# Altium PCB ConnectorBoard.PcbDoc (part 2 of 2)
Units mm, origin at the board's own origin, x right, y up, seen from the top; angles counter-clockwise.
Board outline 139.19 x 208 mm, 4 copper layers (Top Layer, GND, Mid-Layer 1, Bottom Layer); 72 components, 192 nets, 1111 pads, 260 vias.
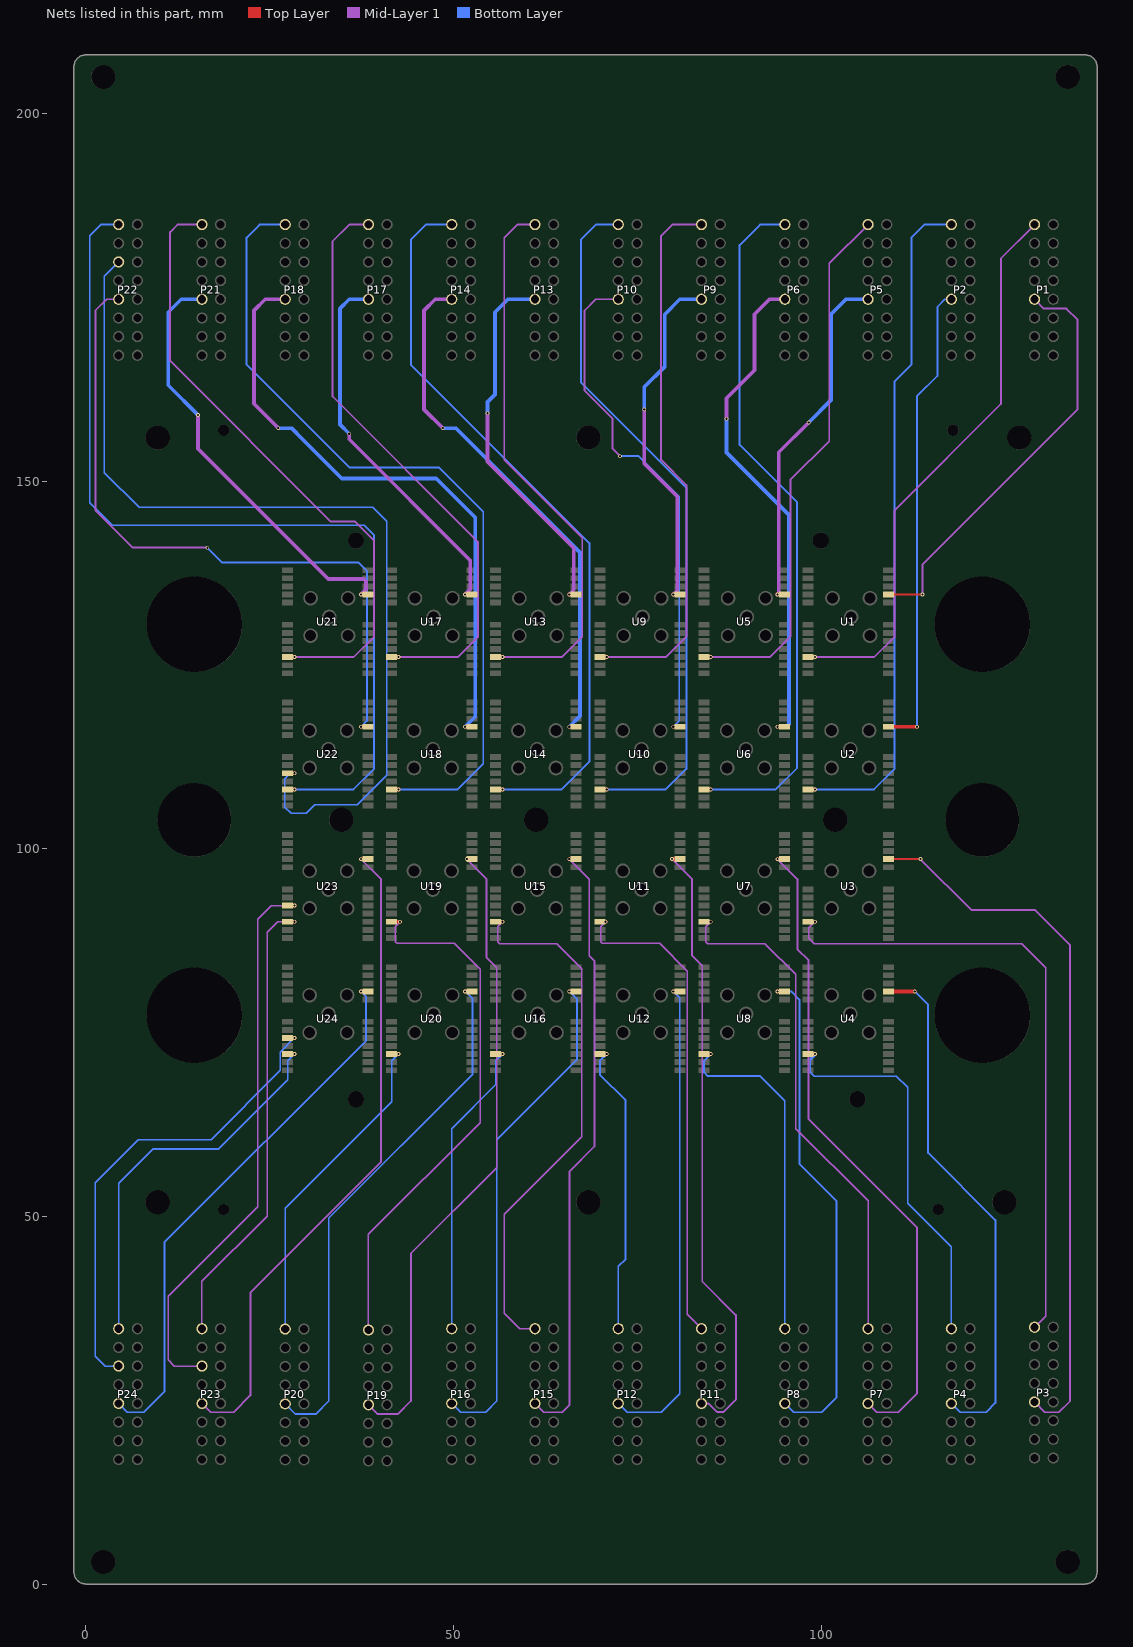
[diagram p4: the nets of this part, all layers, seen from the top]

## Via types
v1: diameter 0.508, hole 0.305, Top Layer to Bottom Layer, tented both sides, 188 vias
v2: diameter 1.016, hole 0.762, Top Layer to Bottom Layer, tented both sides, 72 vias

## Nets (pads, with @x,y where several pads share a name; then routed paths per layer and width w, separated by ;. In a path a pad name is that pad's centre, name@x,y a point inside that pad or via, vN(x,y) a via of type N, cw(c..) or ccw(c..) an arc to the next point about the centre after c; other vN are vias at no path point) (continued)
TXD0_RF22: P22.6 U22.20 | length 128
  Top Layer w0.508: U22.20@27.407,110.28 v1(28.346,110.28)
  Bottom Layer w0.203: P22.6@4.446,179.832 2.489,177.875 2.489,151.181 7.24,146.43 39.006,146.43 40.909,144.526 40.909,109.997 36.888,105.976 31.135,105.976 29.972,104.813 27.904,104.813 27.041,105.676 27.041,109.559 27.762,110.28 v1(28.346,110.28)
TXD0_RF23: P23.6 U23.20 | length 76.6
  Top Layer w0.508: U23.20@27.407,92.28 v1(28.346,92.28)
  Mid-Layer 1 w0.203: P23.6@15.772,29.642 12.014,29.642 11.176,30.48 11.176,39.116 23.368,51.308 23.368,90.424 25.224,92.28 v1(28.346,92.28)
TXD0_RF24: P24.6 U24.20 | length 65
  Top Layer w0.508: U24.20@27.407,74.28 v1(28.346,74.28)
  Bottom Layer w0.203: P24.6@4.446,29.642 2.616,29.642 1.27,30.988 1.27,54.61 7.112,60.452 17.02,60.452 26.418,69.85 26.418,72.352 v1(28.346,74.28)
VBAT_RF1: P1.2 U1.22 | length 76.9
  Top Layer w0.508: U1.22@98.207,126.08 v1(99.146,126.08)
  Mid-Layer 1 w0.254: v1(99.146,126.08) 107.188,126.08 109.982,128.874 109.982,146.05 124.46,160.528 124.46,180.34 P1.2@129.032,184.912
VBAT_RF2: P2.2 U2.22 | length 92.3
  Top Layer w0.508: U2.22@98.207,108.08 v1(99.146,108.08)
  Bottom Layer w0.254: v1(99.146,108.08) 107.188,108.08 109.982,110.874 109.982,163.576 112.268,165.862 112.268,183.134 114.046,184.912 P2.2@117.706,184.912
VBAT_RF3: P3.2 U3.22 | length 87
  Top Layer w0.508: U3.22@98.207,90.08 v1(99.146,90.08)
  Mid-Layer 1 w0.203: v1(99.146,90.08) 98.298,89.232 98.298,87.865 99.041,87.122 127.254,87.122 130.556,83.82 130.556,36.449 P3.2@129.032,34.925
VBAT_RF4: P4.2 U4.22 | length 55
  Top Layer w0.508: U4.22@98.207,72.08 v1(99.146,72.08)
  Bottom Layer w0.203: P4.2@117.706,34.722 117.706,45.87 111.76,51.816 111.76,67.564 110.236,69.088 99.075,69.088 98.536,69.627 98.536,70.132 98.552,70.148 98.536,70.164 98.536,70.98 98.536,71.232 ; 98.536,71.232 98.536,71.248 ; 98.536,71.232 99.146,71.842 v1@99.146,71.858 ; 98.536,71.248 98.536,71.47 v1(99.146,72.08) v1@99.146,71.858 ; 98.536,71.248 v1@99.146,71.858
VBAT_RF5: P5.2 U5.22 | length 73.6
  Top Layer w0.508: U5.22@83.82,126.08 v1(84.986,126.08)
  Mid-Layer 1 w0.254: v1(84.986,126.08) 93.028,126.08 95.822,128.874 95.822,144.272 95.822,150.178 101.092,155.448 101.092,179.624 P5.2@106.38,184.912
VBAT_RF6: P6.2 U6.22 | length 95.8
  Top Layer w0.508: U6.22@83.82,108.08 v1(84.986,108.08)
  Bottom Layer w0.254: v1(84.986,108.08) 93.809,108.08 96.723,110.993 96.723,147.117 88.9,154.94 88.9,182.118 91.694,184.912 P6.2@95.054,184.912
VBAT_RF7: P7.2 U7.22 | length 70.5
  Top Layer w0.508: U7.22@83.82,90.08 v1(84.986,90.08)
  Mid-Layer 1 w0.203: v1(84.986,90.08) 84.328,89.422 84.328,87.376 84.582,87.122 92.356,87.122 96.571,82.907 96.571,61.925 106.38,52.116 P7.2@106.38,34.722
VBAT_RF8: P8.2 U8.22 | length 47.6
  Top Layer w0.508: U8.22@83.82,72.08 v1(84.986,72.08)
  Bottom Layer w0.254: v1(84.986,72.08) 84.074,71.168 84.074,69.596 84.582,69.088 91.694,69.088 95.054,65.728 P8.2@95.054,34.722
VBAT_RF9: P9.2 U9.22 | length 75.3
  Top Layer w0.508: U9.22@69.596,126.08 v1(70.826,126.08)
  Mid-Layer 1 w0.254: v1(70.826,126.08) 78.868,126.08 81.662,128.874 81.662,149.478 78.232,152.908 78.232,183.388 79.756,184.912 P9.2@83.728,184.912
VBAT_RF10: P10.2 U10.22 | length 97.1
  Top Layer w0.508: U10.22@69.596,108.08 v1(70.826,108.08)
  Bottom Layer w0.254: v1(70.826,108.08) 78.868,108.08 81.662,110.874 81.662,149.098 67.31,163.45 67.31,182.88 69.342,184.912 P10.2@72.402,184.912
VBAT_RF11: P11.2 U11.22 | length 66.9
  Top Layer w0.508: U11.22@69.596,90.084 v1(70.653,90.084)
  Mid-Layer 1 w0.203: v1(70.653,90.084) 69.995,89.426 69.995,87.38 70.249,87.126 78.023,87.126 81.788,83.362 81.788,36.662 P11.2@83.728,34.722
VBAT_RF12: P12.2 U12.22 | length 40.8
  Top Layer w0.508: U12.22@69.596,72.08 v1(70.826,72.08)
  Bottom Layer w0.254: v1(70.826,72.08) 69.914,71.168 69.914,69.298 73.406,65.806 73.406,44.196 72.402,43.192 P12.2@72.402,34.722
VBAT_RF13: P13.2 U13.22 | length 76.5
  Top Layer w0.508: U13.22@55.727,126.08 v1(56.666,126.08)
  Mid-Layer 1 w0.254: v1(56.666,126.08) 64.708,126.08 67.502,128.874 67.502,142.302 56.896,152.908 56.896,183.134 58.674,184.912 P13.2@61.076,184.912
VBAT_RF14: P14.2 U14.22 | length 101.8
  Top Layer w0.508: U14.22@55.727,108.08 v1(56.666,108.08)
  Bottom Layer w0.254: P14.2@49.75,184.912 46.228,184.912 44.196,182.88 44.196,165.862 68.478,141.58 68.478,111.85 64.708,108.08 v1(56.666,108.08)
VBAT_RF15: P15.2 U15.22 | length 73.2
  Top Layer w0.508: U15.22@55.727,90.08 v1(56.666,90.08)
  Mid-Layer 1 w0.203: v1(56.666,90.08) 56.008,89.422 56.008,87.376 56.262,87.122 64.036,87.122 67.462,83.695 67.462,60.858 56.896,50.292 56.896,36.83 59.004,34.722 P15.2@61.076,34.722
VBAT_RF16: P16.2 U16.22 | length 41.2
  Top Layer w0.508: U16.22@55.727,72.08 v1(56.666,72.08)
  Bottom Layer w0.254: P16.2@49.75,34.722 49.75,61.942 55.754,67.946 55.754,71.168 v1(56.666,72.08)
VBAT_RF17: P17.2 U17.22 | length 80.7
  Top Layer w0.508: U17.22@41.567,126.08 v1(42.506,126.08)
  Mid-Layer 1 w0.254: P17.2@38.424,184.912 35.814,184.912 33.528,182.626 33.528,161.544 53.342,141.73 53.342,128.874 50.548,126.08 v1(42.506,126.08)
VBAT_RF18: P18.2 U18.22 | length 111.9
  Top Layer w0.508: U18.22@41.567,108.08 v1(42.506,108.08)
  Bottom Layer w0.254: P18.2@27.098,184.912 23.622,184.912 21.844,183.134 21.844,165.862 35.814,151.892 48.006,151.892 54.038,145.859 54.038,111.57 50.548,108.08 v1(42.506,108.08)
VBAT_RF19: P19.2 U19.22 | length 72.6
  Top Layer w0.508: U19.22@41.567,90.084 v1(42.713,90.084)
  Mid-Layer 1 w0.203: P19.2@38.424,34.544 38.424,47.568 53.594,62.738 53.594,83.616 50.083,87.126 42.309,87.126 42.055,87.38 42.055,89.426 v1(42.713,90.084)
VBAT_RF20: P20.2 U20.22 | length 44.7
  Top Layer w0.508: U20.22@41.567,72.08 v1(42.506,72.08)
  Bottom Layer w0.254: P20.2@27.098,34.671 27.098,51.097 41.594,65.593 41.594,71.168 v1(42.506,72.08)
VBAT_RF21: P21.2 U21.22 | length 86.1
  Top Layer w0.508: U21.22@27.407,126.08 v1(28.346,126.08)
  Mid-Layer 1 w0.254: P21.2@15.772,184.912 12.446,184.912 11.43,183.896 11.43,166.37 33.297,144.503 36.599,144.503 39.182,141.92 39.182,128.874 36.388,126.08 v1(28.346,126.08)
VBAT_RF22: P22.2 U22.22 | length 126.1
  Top Layer w0.508: U22.22@27.407,108.08 v1(28.346,108.08)
  Bottom Layer w0.254: P22.2@4.446,184.912 2.032,184.912 0.508,183.388 0.508,147.066 3.556,144.018 37.846,144.018 39.182,142.682 39.182,110.874 36.388,108.08 v1(28.346,108.08)
VBAT_RF23: P23.2 U23.22 | length 62.8
  Top Layer w0.508: U23.22@27.407,90.08 v1(28.346,90.08)
  Mid-Layer 1 w0.203: P23.2@15.772,34.722 15.772,41.172 24.638,50.038 24.638,88.646 26.072,90.08 v1(28.346,90.08)
VBAT_RF24: P24.2 U24.22 | length 53.4
  Top Layer w0.508: U24.22@27.407,72.08 v1(28.346,72.08)
  Bottom Layer w0.254: P24.2@4.446,34.722 4.446,54.484 9.144,59.182 18.034,59.182 27.434,68.582 27.434,71.168 v1(28.346,72.08)
VCC_RF_RF1: P1.10 U1.9 | length 57.7
  Top Layer w0.254: U1.9@109.147,134.6 v1(113.797,134.6)
  Mid-Layer 1 w0.254: v1(113.797,134.6) 113.797,138.689 134.874,159.766 134.874,171.958 133.35,173.482 130.302,173.482 P1.10@129.032,174.752
VCC_RF_RF2: P2.10 U2.9 | length 64.5
  Top Layer w0.508: U2.9@109.147,116.6 v1(113.03,116.6)
  Bottom Layer w0.254: v1(113.03,116.6) 113.027,116.602 113.027,161.541 115.824,164.338 115.824,173.736 116.84,174.752 P2.10@117.706,174.752
VCC_RF_RF3: P3.10 U3.9 | length 97.6
  Top Layer w0.254: U3.9@109.147,98.602 v1(113.498,98.602)
  Mid-Layer 1 w0.254: v1(113.498,98.602) 120.406,91.694 129.032,91.694 133.858,86.868 133.858,24.892 132.334,23.368 130.429,23.368 P3.10@129.032,24.765
VCC_RF_RF4: P4.10 U4.9 | length 71.1
  Top Layer w0.508: U4.9@109.147,80.602 v1(112.731,80.602)
  Bottom Layer w0.254: v1(112.731,80.602) 114.554,78.779 114.554,58.645 123.698,49.501 123.698,24.638 122.428,23.368 118.9,23.368 P4.10@117.706,24.562
VCC_RF_RF5: P5.10 U5.9 | length 48
  Top Layer w0.508: v1(94.047,134.6) U5.9@94.987,134.6
  Mid-Layer 1 w0.508: v1(94.047,134.6) 94.245,134.797 94.245,153.935 v1(98.298,157.988)
  Bottom Layer w0.508: v1(98.298,157.988) 101.346,161.036 101.346,172.72 103.378,174.752 P5.10@106.38,174.752
VCC_RF_RF6: P6.10 U6.9 | length 68.5
  Top Layer w0.508: v1(94.047,116.6) U6.9@94.987,116.6
  Mid-Layer 1 w0.508: v1(87.122,158.496) 87.122,161.29 90.932,165.1 90.932,172.72 92.964,174.752 P6.10@95.054,174.752
  Bottom Layer w0.508: v1(87.122,158.496) 87.122,153.924 95.631,145.415 95.631,116.967 95.264,116.6 v1(94.047,116.6)
VCC_RF_RF7: P7.10 U7.9 | length 89.7
  Top Layer w0.508: v1(94.047,98.6) U7.9@94.987,98.6
  Mid-Layer 1 w0.254: v1(94.047,98.6) 96.774,95.873 96.774,86.36 98.298,84.836 98.298,63.246 113.03,48.514 113.03,25.908 110.49,23.368 107.574,23.368 P7.10@106.38,24.562
VCC_RF_RF8: P8.10 U8.9 | length 69
  Top Layer w0.508: v1(94.047,80.6) U8.9@94.987,80.6
  Bottom Layer w0.254: v1(94.047,80.6) 95.93,80.6 97.028,79.502 97.028,57.15 102.108,52.07 102.108,25.4 100.076,23.368 96.248,23.368 P8.10@95.054,24.562
VCC_RF_RF9: P9.10 U9.9 | length 48.3
  Top Layer w0.508: v1(79.887,134.6) U9.9@81.026,134.6
  Mid-Layer 1 w0.508: v1(75.946,159.766) 75.946,152.4 79.887,148.459 80.416,147.93 80.416,135.129 v1(79.887,134.6)
  Bottom Layer w0.508: v1(75.946,159.766) 75.946,162.814 78.74,165.608 78.74,172.72 80.772,174.752 P9.10@83.728,174.752
VCC_RF_RF10: P10.10 U10.9 | length 70.1
  Top Layer w0.508: v1(79.887,116.6) U10.9@81.026,116.6
  Mid-Layer 1 w0.254: P10.10@72.402,174.752 69.342,174.752 67.818,173.228 67.818,162.306 71.628,158.496 71.628,154.432 v1(72.644,153.416)
  Bottom Layer w0.254: v1(72.644,153.416) 75.184,153.416 80.697,147.903 80.697,117.409 v1(79.887,116.6)
VCC_RF_RF11: P11.10 U11.9 | length 84.3
  Top Layer w0.508: v1(79.715,98.604) U11.9@81.026,98.604
  Mid-Layer 1 w0.254: v1(79.715,98.604) 82.441,95.877 82.441,85.453 83.82,84.074 83.82,41.148 88.392,36.576 88.392,25.069 86.741,23.419 85.795,23.419 84.652,24.562 P11.10@83.728,24.562
VCC_RF_RF12: P12.10 U12.9 | length 66.1
  Top Layer w0.508: v1(79.887,80.6) U12.9@81.026,80.6
  Bottom Layer w0.254: P12.10@72.402,24.562 73.596,23.368 78.232,23.368 80.772,25.908 80.772,79.715 v1(79.887,80.6)
VCC_RF_RF13: P13.10 U13.9 | length 51.2
  Top Layer w0.508: v1(65.727,134.6) U13.9@66.802,134.6
  Mid-Layer 1 w0.508: v1(54.61,159.258) 54.61,152.654 66.359,140.905 66.359,135.231 v1(65.727,134.6)
  Bottom Layer w0.508: v1(54.61,159.258) 54.61,160.782 55.626,161.798 55.626,172.974 57.404,174.752 P13.10@61.076,174.752
VCC_RF_RF14: P14.10 U14.9 | length 72.6
  Top Layer w0.508: v1(65.727,116.6) U14.9@66.802,116.6
  Mid-Layer 1 w0.508: v1(48.514,157.226) 45.974,159.766 45.974,173.228 47.498,174.752 P14.10@49.75,174.752
  Bottom Layer w0.508: v1(48.514,157.226) 50.292,157.226 67.208,140.31 67.208,118.081 v1(65.727,116.6)
VCC_RF_RF15: P15.10 U15.9 | length 83.7
  Top Layer w0.508: v1(65.727,98.6) U15.9@66.802,98.6
  Mid-Layer 1 w0.254: P15.10@61.076,24.562 62.27,23.368 64.77,23.368 65.786,24.384 65.786,56.134 69.164,59.512 69.164,84.76 68.454,85.47 68.454,95.873 v1(65.727,98.6)
VCC_RF_RF16: P16.10 U16.9 | length 69
  Top Layer w0.508: v1(65.727,80.6) U16.9@66.802,80.6
  Bottom Layer w0.254: P16.10@49.75,24.562 50.944,23.368 54.356,23.368 55.88,24.892 55.88,60.452 66.802,71.374 66.802,79.525 v1(65.727,80.6)
VCC_RF_RF17: P17.10 U17.9 | length 51.8
  Top Layer w0.508: v1(51.567,134.6) U17.9@52.507,134.6
  Mid-Layer 1 w0.508: v1(35.814,156.464) 35.814,155.702 52.25,139.266 52.25,135.282 v1(51.567,134.6)
  Bottom Layer w0.508: v1(35.814,156.464) 34.544,157.734 34.544,173.482 35.814,174.752 P17.10@38.424,174.752
VCC_RF_RF18: P18.10 U18.9 | length 85.1
  Top Layer w0.508: v1(51.567,116.6) U18.9@52.507,116.6
  Mid-Layer 1 w0.508: v1(26.162,157.226) 22.86,160.528 22.86,173.228 24.384,174.752 P18.10@27.098,174.752
  Bottom Layer w0.508: v1(26.162,157.226) 27.94,157.226 29.464,155.702 ; 28.702,156.464 29.464,155.702 ; v1(51.567,116.6) 52.946,117.979 52.946,145.074 47.652,150.368 34.798,150.368 29.464,155.702
VCC_RF_RF19: P19.10 U19.9 | length 88.8
  Top Layer w0.508: v1(51.775,98.604) U19.9@52.507,98.604
  Mid-Layer 1 w0.254: P19.10@38.424,24.384 39.694,23.114 42.418,23.114 44.196,24.892 44.196,44.958 55.88,56.642 55.88,83.82 54.501,85.199 54.501,87.122 ; v1(51.775,98.604) 54.501,95.877 54.501,87.122 ; 54.501,86.364 54.501,87.122
VCC_RF_RF20: P20.10 U20.9 | length 72.4
  Top Layer w0.508: v1(51.567,80.6) U20.9@52.507,80.6
  Bottom Layer w0.254: P20.10@27.098,24.511 28.495,23.114 31.242,23.114 33.02,24.892 33.02,49.784 52.578,69.342 52.578,79.589 v1(51.567,80.6)
VCC_RF_RF21: P21.10 U21.9 | length 59.2
  Top Layer w0.508: v1(37.407,134.6) U21.9@38.608,134.6
  Mid-Layer 1 w0.508: v1(15.24,159.004) 15.24,154.432 32.309,137.363 32.512,137.16 32.956,136.716 36.168,136.716 37.772,136.716 38.09,136.398 38.09,135.282 v1(37.407,134.6)
  Bottom Layer w0.508: v1(15.24,159.004) 11.176,163.068 11.176,172.974 12.954,174.752 P21.10@15.772,174.752
VCC_RF_RF22: P22.10 U22.9 | length 94.1
  Top Layer w0.508: v1(37.407,116.6) U22.9@38.608,116.6
  Mid-Layer 1 w0.254: P22.10@4.446,174.752 2.794,174.752 1.27,173.228 1.27,146.05 6.35,140.97 v1(16.51,140.97)
  Bottom Layer w0.254: v1(16.51,140.97) 18.542,138.938 37.084,138.938 38.217,137.805 38.217,117.409 v1(37.407,116.6)
VCC_RF_RF23: P23.10 U23.9 | length 90.9
  Top Layer w0.508: v1(37.407,98.6) U23.9@38.608,98.6
  Mid-Layer 1 w0.254: P23.10@15.772,24.562 16.966,23.368 20.066,23.368 22.352,25.654 22.352,39.624 40.134,57.406 40.134,86.614 ; v1(37.407,98.6) 40.134,95.873 40.134,86.614 ; 40.134,86.36 40.134,86.614
VCC_RF_RF24: P24.10 U24.9 | length 75.2
  Top Layer w0.508: v1(37.407,80.6) U24.9@38.608,80.6
  Bottom Layer w0.254: P24.10@4.446,24.562 5.64,23.368 7.874,23.368 10.668,26.162 10.668,46.482 38.1,73.914 38.1,79.907 v1(37.407,80.6)
pads on no net: P1.3 P1.4 P1.7 P1.8 P1.11 P1.12 P1.16 P2.3 P2.4 P2.7 P2.8 P2.11 P2.12 P2.16 P3.3 P3.4 P3.7 P3.8 P3.11 P3.12 P3.16 P4.3 P4.4 P4.7 P4.8 P4.11 P4.12 P4.16 P5.3 P5.4 P5.7 P5.8 P5.11 P5.12 P5.16 P6.3 P6.4 P6.7 P6.8 P6.11 P6.12 P6.16 P7.3 P7.4 P7.7 P7.8 P7.11 P7.12 P7.16 P8.3 P8.4 P8.7 P8.8 P8.11 P8.12 P8.16 P9.3 P9.4 P9.7 P9.8 P9.11 P9.12 P9.16 P10.3 P10.4 P10.7 P10.8 P10.11 P10.12 P10.16 P11.3 P11.4 P11.7 P11.8 P11.11 P11.12 P11.16 P12.3 P12.4 P12.7 P12.8 P12.11 P12.12 P12.16 P13.3 P13.4 P13.7 P13.8 P13.11 P13.12 P13.16 P14.3 P14.4 P14.7 P14.8 P14.11 P14.12 P14.16 P15.3 P15.4 P15.7 P15.8 P15.11 P15.12 P15.16 P16.3 P16.4 P16.7 P16.8 P16.11 P16.12 P16.16 P17.3 P17.4 P17.7 P17.8 P17.11 P17.12 P17.16 P18.3 P18.4 P18.7 P18.8 P18.11 P18.12 P18.16 P19.3 P19.4 P19.7 P19.8 P19.11 P19.12 P19.16 P20.3 P20.4 P20.7 P20.8 P20.11 P20.12 P20.16 P21.3 P21.4 P21.7 P21.8 P21.11 P21.12 P21.16 P22.3 P22.4 P22.7 P22.8 P22.11 P22.12 P22.16 P23.3 P23.4 P23.7 P23.8 P23.11 P23.12 P23.16 P24.3 P24.4 P24.7 P24.8 P24.11 P24.12 P24.16 U1.1 U1.2 U1.3 U1.4 U1.5 U1.6 U1.7 U1.14 U1.15 U1.16 U1.17 U1.18 U1.19 U2.1 U2.2 U2.3 U2.4 U2.5 U2.6 U2.7 U2.14 U2.15 U2.16 U2.17 U2.18 U2.19 U3.1 U3.2 U3.3 U3.4 U3.5 U3.6 U3.7 U3.14 U3.15 U3.16 U3.17 U3.18 U3.19 U4.1 U4.2 U4.3 U4.4 U4.5 U4.6 U4.7 U4.14 U4.15 U4.16 U4.17 U4.18 U4.19 U5.1 U5.2 U5.3 U5.4 U5.5 U5.6 U5.7 U5.14 U5.15 U5.16 U5.17 U5.18 U5.19 U6.1 U6.2 U6.3 U6.4 U6.5 U6.6 U6.7 U6.14 U6.15 U6.16 U6.17 U6.18 U6.19 U7.1 U7.2 U7.3 U7.4 U7.5 U7.6 U7.7 U7.14 U7.15 U7.16 U7.17 U7.18 U7.19 U8.1 U8.2 U8.3 U8.4 U8.5 U8.6 U8.7 U8.14 U8.15 U8.16 U8.17 U8.18 U8.19 U9.1 U9.2 U9.3 U9.4 U9.5 U9.6 U9.7 U9.14 U9.15 U9.16 U9.17 U9.18 U9.19 U10.1 U10.2 U10.3 U10.4 U10.5 U10.6 U10.7 U10.14 U10.15 U10.16 U10.17 U10.18 U10.19 U11.1 U11.2 U11.3 U11.4 U11.5 U11.6 U11.7 U11.14 U11.15 U11.16 U11.17 U11.18 U11.19 U12.1 U12.2 U12.3 U12.4 U12.5 U12.6 U12.7 U12.14 U12.15 U12.16 U12.17 U12.18 U12.19 U13.1 U13.2 U13.3 U13.4 U13.5 U13.6 U13.7 U13.14 U13.15 U13.16 U13.17 U13.18 U13.19 U14.1 U14.2 U14.3 U14.4 U14.5 U14.6 U14.7 U14.14 U14.15 U14.16 U14.17 U14.18 U14.19 U15.1 U15.2 U15.3 U15.4 U15.5 U15.6 U15.7 U15.14 U15.15 U15.16 U15.17 U15.18 U15.19 U16.1 U16.2 U16.3 U16.4 U16.5 U16.6 U16.7 U16.14 U16.15 U16.16 U16.17 U16.18 U16.19 U17.1 U17.2 U17.3 U17.4 U17.5 U17.6 U17.7 U17.14 U17.15 U17.16 U17.17 U17.18 U17.19 U18.1 U18.2 U18.3 U18.4 U18.5 U18.6 U18.7 U18.14 U18.15 U18.16 U18.17 U18.18 U18.19 U19.1 U19.2 U19.3 U19.4 U19.5 U19.6 U19.7 U19.14 U19.15 U19.16 U19.17 U19.18 U19.19 U20.1 U20.2 U20.3 U20.4 U20.5 U20.6 U20.7 U20.14 U20.15 U20.16 U20.17 U20.18 U20.19 U21.1 U21.2 U21.3 U21.4 U21.5 U21.6 U21.7 U21.14 U21.15 U21.16 U21.17 U21.18 U21.19 U22.1 U22.2 U22.3 U22.4 U22.5 U22.6 U22.7 U22.14 U22.15 U22.16 U22.17 U22.18 U22.19 U23.1 U23.2 U23.3 U23.4 U23.5 U23.6 U23.7 U23.14 U23.15 U23.16 U23.17 U23.18 U23.19 U24.1 U24.2 U24.3 U24.4 U24.5 U24.6 U24.7 U24.14 U24.15 U24.16 U24.17 U24.18 U24.19

## Polygon pours and split planes (outlines as drawn)
GND_RF22 on GND (split plane): 0,207.49 10.412,207.49 10.412,154.432 10.421,154.366 10.446,154.304 10.487,154.251 23.62,141.118 23.62,124.206 23.629,124.14 23.654,124.078 23.695,124.025 25.473,122.247 25.526,122.206 25.57,122.188 25.588,122.181 25.654,122.172 38.352,122.172 38.352,103.634 -1.14,103.634 -1.14,206.35 -1.141,206.364 -1.132,206.499 -1.103,206.646 -1.055,206.787 -0.989,206.921 -0.906,207.045 -0.807,207.157 -0.695,207.256 -0.571,207.339 -0.437,207.405 -0.296,207.453 -0.149,207.482 -0.014,207.491
GND_RF3 on GND (split plane): 137.026,1.65 137.027,1.636 137.019,1.501 136.989,1.354 136.941,1.213 136.875,1.079 136.792,0.955 136.694,0.843 136.582,0.744 136.457,0.661 136.323,0.595 136.182,0.547 136.035,0.518 135.901,0.509 135.886,0.51 125.732,0.51 125.732,52.324 125.723,52.39 125.698,52.452 125.657,52.505 112.524,65.638 112.524,84.836 112.515,84.902 112.49,84.964 112.449,85.017 112.396,85.058 112.334,85.083 112.268,85.092 97.538,85.092 97.538,103.122 137.026,103.122
GND_RF24 on GND (split plane): 37.59,71.988 31.898,66.296 27.686,66.296 27.62,66.287 27.602,66.28 27.558,66.262 27.505,66.221 11.503,50.219 11.462,50.166 11.437,50.104 11.428,50.038 11.428,0.51 0,0.51 -0.014,0.509 -0.149,0.518 -0.296,0.547 -0.437,0.595 -0.571,0.661 -0.695,0.744 -0.807,0.843 -0.906,0.955 -0.989,1.079 -1.055,1.213 -1.103,1.354 -1.132,1.501 -1.141,1.636 -1.14,1.65 -1.14,84.834 37.59,84.834
GND_RF1 on GND (split plane): 136.035,207.482 136.182,207.453 136.323,207.405 136.457,207.339 136.582,207.256 136.694,207.157 136.792,207.045 136.875,206.921 136.941,206.787 136.989,206.646 137.019,206.499 137.027,206.364 137.026,206.35 137.026,122.684 98.046,122.684 98.046,137.308 101.198,140.46 108.458,140.46 108.524,140.469 108.586,140.494 108.639,140.535 124.641,156.537 124.682,156.59 124.7,156.634 124.707,156.652 124.716,156.718 124.716,207.49 135.886,207.49 135.901,207.491
GND_RF2 on GND (split plane): 124.204,156.824 108.352,140.972 101.092,140.972 101.026,140.963 100.982,140.945 100.964,140.938 100.911,140.897 97.609,137.595 97.568,137.542 97.543,137.48 97.534,137.414 97.534,122.428 97.543,122.362 97.568,122.3 97.609,122.247 97.662,122.206 97.724,122.181 97.79,122.172 137.026,122.172 137.026,103.634 95.506,103.634 95.506,104.902 95.506,142.388 114.227,161.109 114.268,161.162 114.293,161.224 114.302,161.29 114.302,207.49 124.204,207.49
GND_RF23 on GND (split plane): 38.352,101.854 38.361,101.788 38.386,101.726 38.427,101.673 38.48,101.632 38.542,101.607 38.608,101.598 38.674,101.607 38.736,101.632 38.789,101.673 39.622,102.505 39.622,65.892 21.917,48.187 21.876,48.134 21.851,48.072 21.842,48.006 21.842,0.51 11.94,0.51 11.94,49.932 27.792,65.784 32.004,65.784 32.07,65.793 32.132,65.818 32.185,65.859 38.027,71.701 38.068,71.754 38.086,71.798 38.093,71.816 38.102,71.882 38.102,85.09 38.093,85.156 38.068,85.218 38.027,85.271 37.974,85.312 37.912,85.337 37.846,85.346 -1.14,85.346 -1.14,103.122 38.352,103.122
GND_RF18 on GND (split plane): 35.304,158.496 35.313,158.43 35.338,158.368 35.379,158.315 41.146,152.548 41.146,122.936 41.155,122.87 41.18,122.808 41.221,122.755 41.274,122.714 41.336,122.689 41.402,122.68 52.576,122.68 52.576,103.634 38.864,103.634 38.864,142.494 38.855,142.56 38.83,142.622 38.789,142.675 22.354,159.11 22.354,207.49 35.304,207.49
GND_RF4 on GND (split plane): 112.012,65.532 112.021,65.466 112.046,65.404 112.087,65.351 125.22,52.218 125.22,0.51 114.302,0.51 114.302,47.752 114.293,47.818 114.275,47.862 114.268,47.88 114.227,47.933 97.538,64.622 97.538,84.58 112.012,84.58
GND_RF21 on GND (split plane): 21.842,159.004 21.851,158.938 21.876,158.876 21.917,158.823 38.352,142.388 38.352,122.684 25.76,122.684 24.132,124.312 24.132,141.224 24.123,141.29 24.098,141.352 24.057,141.405 10.924,154.538 10.924,207.49 21.842,207.49
GND_RF7 on GND (split plane): 97.026,64.516 97.035,64.45 97.06,64.388 97.101,64.335 113.79,47.646 113.79,0.51 100.84,0.51 100.84,48.26 100.831,48.326 100.824,48.344 100.806,48.388 100.765,48.441 94.998,54.208 94.998,84.836 94.989,84.902 94.964,84.964 94.923,85.017 94.87,85.058 94.808,85.083 94.742,85.092 83.568,85.092 83.568,103.122 97.026,103.122
GND_RF10 on GND (split plane): 78.992,150.728 70.177,141.913 70.136,141.86 70.111,141.798 70.102,141.732 70.102,123.19 70.111,123.124 70.136,123.062 70.177,123.009 70.431,122.755 70.484,122.714 70.528,122.696 70.546,122.689 70.612,122.68 81.278,122.68 81.278,103.634 68.178,103.634 68.074,103.738 68.074,143.256 68.065,143.322 68.04,143.384 67.999,143.437 65.28,146.156 65.28,159.406 68.253,162.379 68.294,162.432 68.319,162.494 68.328,162.56 68.328,207.49 78.992,207.49
GND_RF15 on GND (split plane): 67.571,103.058 67.596,102.996 67.637,102.943 67.69,102.902 67.752,102.877 67.818,102.868 67.884,102.877 67.946,102.902 67.999,102.943 68.04,102.996 68.055,103.033 68.578,102.51 68.578,62.992 68.587,62.926 68.612,62.864 68.653,62.811 70.864,60.6 70.864,47.35 67.891,44.377 67.85,44.324 67.825,44.262 67.816,44.196 67.816,0.51 57.152,0.51 57.152,56.028 65.967,64.843 66.008,64.896 66.026,64.94 66.033,64.958 66.042,65.024 66.042,85.09 66.033,85.156 66.008,85.218 65.967,85.271 65.914,85.312 65.852,85.337 65.786,85.346 54.866,85.346 54.866,103.122 67.562,103.122
GND_RF13 on GND (split plane): 67.816,162.666 64.843,159.693 64.802,159.64 64.777,159.578 64.768,159.512 64.768,146.05 64.777,145.984 64.802,145.922 64.843,145.869 67.562,143.15 67.562,122.938 55.882,122.938 55.882,207.49 67.816,207.49
GND_RF19 on GND (split plane): 54.354,66.4 45.285,57.331 45.244,57.278 45.219,57.216 45.21,57.15 45.21,0.51 34.546,0.51 34.546,51.964 52.505,69.923 52.546,69.976 52.571,70.038 52.58,70.104 52.58,85.09 52.571,85.156 52.546,85.218 52.505,85.271 52.452,85.312 52.39,85.337 52.324,85.346 40.134,85.346 40.134,103.018 40.238,103.122 54.354,103.122
GND_RF9 on GND (split plane): 90.422,149.712 81.353,140.643 81.312,140.59 81.287,140.528 81.278,140.462 81.278,123.192 70.718,123.192 70.614,123.296 70.614,141.626 79.429,150.441 79.47,150.494 79.488,150.538 79.495,150.556 79.504,150.622 79.504,207.49 90.422,207.49
GND_RF16 on GND (split plane): 65.53,65.13 56.715,56.315 56.674,56.262 56.649,56.2 56.64,56.134 56.64,0.51 45.722,0.51 45.722,57.044 54.791,66.113 54.832,66.166 54.845,66.197 54.857,66.228 54.866,66.294 54.866,84.834 65.53,84.834
GND_RF6 on GND (split plane): 101.598,156.062 83.639,138.103 83.598,138.05 83.573,137.988 83.564,137.922 83.564,122.682 83.573,122.616 83.598,122.554 83.639,122.501 83.692,122.46 83.754,122.435 83.82,122.426 94.994,122.426 94.994,104.902 94.994,103.634 81.79,103.634 81.79,140.356 90.859,149.425 90.9,149.478 90.913,149.509 90.925,149.54 90.934,149.606 90.934,207.49 101.598,207.49
GND_RF20 on GND (split plane): 52.068,70.21 34.109,52.251 34.068,52.198 34.043,52.136 34.034,52.07 34.034,0.51 22.354,0.51 22.354,47.9 40.059,65.605 40.1,65.658 40.125,65.72 40.134,65.786 40.134,84.834 52.068,84.834
GND_RF12 on GND (split plane): 79.754,0.51 68.328,0.51 68.328,44.09 71.301,47.063 71.342,47.116 71.367,47.178 71.376,47.244 71.376,60.706 71.367,60.772 71.342,60.834 71.301,60.887 69.09,63.098 69.09,84.58 79.754,84.58
GND_RF5 on GND (split plane): 113.79,161.396 95.069,142.675 95.028,142.622 95.003,142.56 94.994,142.494 94.994,122.938 84.076,122.938 84.076,137.816 102.035,155.775 102.076,155.828 102.101,155.89 102.11,155.956 102.11,207.49 113.79,207.49
GND_RF17 on GND (split plane): 46.226,155.194 46.235,155.128 46.26,155.066 46.301,155.013 52.576,148.738 52.576,132.588 52.576,123.192 41.658,123.192 41.658,152.654 41.649,152.72 41.642,152.738 41.624,152.782 41.583,152.835 35.816,158.602 35.816,207.49 46.226,207.49
GND_RF8 on GND (split plane): 94.486,54.102 94.495,54.036 94.52,53.974 94.561,53.921 100.328,48.154 100.328,0.51 89.918,0.51 89.918,51.562 89.909,51.628 89.891,51.672 89.884,51.69 89.843,51.743 83.568,58.018 83.568,74.168 83.568,84.58 94.486,84.58
GND_RF11 on GND (split plane): 83.056,74.168 83.056,57.912 83.065,57.846 83.09,57.784 83.131,57.731 89.406,51.456 89.406,0.51 80.266,0.51 80.266,84.836 80.257,84.902 80.232,84.964 80.191,85.017 80.138,85.058 80.076,85.083 80.01,85.092 69.09,85.092 69.09,102.616 69.081,102.682 69.074,102.7 69.056,102.744 69.015,102.797 68.691,103.122 83.056,103.122
GND_RF14 on GND (split plane): 55.37,122.682 55.379,122.616 55.404,122.554 55.445,122.501 55.498,122.46 55.56,122.435 55.626,122.426 67.562,122.426 67.562,103.634 53.088,103.634 53.088,132.588 53.088,148.844 53.079,148.91 53.061,148.954 53.054,148.972 53.013,149.025 46.738,155.3 46.738,207.49 55.37,207.49
GND_RF23 on GND (split plane): 38.864,102.473 38.864,103.122 39.513,103.122

## Other copper
GND (plane layer: these items are gaps in the copper):
  lines w0.508: -1.778,103.632 -1.524,103.378 137.794,103.378 ; -1.65,103.378 137.668,103.378 137.922,103.124 ; -1.392,85.09 37.846,85.09 37.846,71.882 32.004,66.04 27.686,66.04 11.684,50.038 11.684,-1.016 ; 10.668,208 10.668,154.432 23.876,141.224 23.876,124.206 25.654,122.428 38.608,122.428 ; 22.098,-1.244 22.098,48.006 39.878,65.786 39.878,103.124 ; 22.352,208 22.098,207.746 22.098,159.004 38.608,142.494 38.608,101.854 40.132,103.378 ; 34.29,-1.244 34.29,52.07 52.324,70.104 52.324,85.09 40.132,85.09 ; 35.56,208.534 35.56,158.496 41.402,152.654 41.402,122.936 52.832,122.936 ; 45.466,-1.244 45.466,57.15 54.61,66.294 54.61,103.378 ; 46.482,208 46.482,155.194 52.832,148.844 52.832,132.588 52.832,103.378 ; 54.61,85.09 65.786,85.09 65.786,65.024 56.896,56.134 56.896,-1.244 ; 55.626,208 55.626,122.682 67.818,122.682 ; 67.818,103.124 67.818,143.256 65.024,146.05 65.024,159.512 68.072,162.56 68.072,208 ; 67.818,103.632 68.834,102.616 68.834,62.992 71.12,60.706 71.12,47.244 68.072,44.196 68.072,-1.244 ; 68.834,84.836 80.01,84.836 80.01,-1.244 ; 79.248,208 79.248,150.622 70.358,141.732 70.358,123.19 70.612,122.936 81.534,122.936 ; 81.534,103.378 81.534,140.462 90.678,149.606 90.678,208 ; 83.312,84.836 94.742,84.836 94.742,54.102 100.584,48.26 100.584,-1.778 ; 83.312,103.378 83.312,74.168 83.312,57.912 89.662,51.562 89.662,-1.244 ; 95.25,122.682 83.82,122.682 83.82,137.922 101.854,155.956 101.854,208 ; 96.774,103.378 95.25,103.378 95.25,104.902 95.25,142.494 114.046,161.29 114.046,208 ; 97.282,84.836 112.268,84.836 112.268,65.532 125.476,52.324 125.476,-1.244 ; 97.282,103.378 97.282,64.516 114.046,47.752 114.046,-0.99 113.792,-1.244 ; 124.46,207.772 124.46,156.718 108.458,140.716 101.092,140.716 97.79,137.414 97.79,122.428 137.536,122.428

## Silkscreen, mask and mechanical layers (free items; w line width, h text height)
Top Overlay:
  text "M20" at 30.404,140.868 h1.02
  text "M17" at 45.06,140.868 h1.02
  text "M13" at 59.715,140.868 h1.02
  text "M9" at 74.371,140.868 h1.02
  text "M5" at 89.027,140.868 h1.02
  text "M1" at 103.683,140.868 h1.02
  text "M4" at 32.156,125.222 h1.02
  text "M3" at 31.775,107.188 h1.02
  text "M2" at 31.775,88.468 h1.02
  text "Connector Board V1.0" at 48.514,4.318 h2.54
Mechanical 1:
  the board outline again, w0.305
Mechanical 7:
  text "HDM1216-24TF_V2.0" at -0.089,113.383 h3.56 r270
Mechanical 10:
  text "R26" at 20.079,148.536 h0.89
  text "R34" at 42.355,148.536 h0.89
  text "R30" at 85.484,148.536 h0.89
  text "R27" at 35.116,148.409 h0.89
  text "R28" at 49.543,148.409 h0.89
  text "R33" at 57.062,148.409 h0.89
  text "R29" at 71.006,148.409 h0.89
  text "R32" at 78.423,148.409 h0.89
  text "R36" at 100.902,148.409 h0.89
  text "R37" at 107.455,148.409 h0.89
  text "R35" at 27.445,148.282 h0.89
  text "R31" at 93.485,148.282 h0.89
  text "D52" at 21.146,147.901 h0.89 r270
  text "D70" at 28.258,147.901 h0.89 r270
  text "D66" at 58.484,147.901 h0.89 r270
  text "D68" at 43.752,147.774 h0.89 r270
  text "D74" at 108.395,147.774 h0.89 r270
  text "D56" at 50.864,147.647 h0.89 r270
  text "D58" at 72.2,147.647 h0.89 r270
  text "D60" at 86.932,147.647 h0.89 r270
  text "D64" at 79.185,147.52 h0.89 r270
  text "D62" at 93.155,147.52 h0.89 r270
  text "D72" at 102.172,147.52 h0.89 r270
  text "D54" at 34.862,146.758 h0.89 r270
  text "R3" at 35.116,146.758 h0.89
  text "R6" at 85.992,146.758 h0.89
  text "R2" at 20.206,146.631 h0.89
  text "R11" at 28.207,146.631 h0.89
  text "R9" at 57.189,146.631 h0.89
  text "R5" at 70.879,146.631 h0.89
  text "R8" at 78.55,146.631 h0.89
  text "R10" at 42.609,146.504 h0.89
  text "R4" at 50.178,146.504 h0.89
  text "R13" at 107.709,146.504 h0.89
  text "R12" at 101.156,146.377 h0.89
  text "R7" at 93.612,146.25 h0.89
  text "Q8" at 81.852,140.916 h0.89
  text "Q7" at 95.949,140.916 h0.89
  text "Q9" at 61.151,140.789 h0.89
  text "Q5" at 74.867,140.789 h0.89
  text "Q6" at 89.345,140.789 h0.89
  text "Q13" at 111.316,140.789 h0.89
  text "Q2" at 23.965,140.662 h0.89
  text "Q11" at 31.052,140.662 h0.89
  text "Q3" at 39.688,140.662 h0.89
  text "Q10" at 46.292,140.662 h0.89
  text "Q4" at 53.531,140.662 h0.89
  text "Q12" at 104.585,140.662 h0.89
  text "D221" at 77.458,137.868 h0.89
  text "D218" at 35.04,137.741 h0.89
  text "D219" at 49.086,137.614 h0.89
  text "D220" at 63.412,137.614 h0.89
  text "D222" at 91.479,137.614 h0.89
  text "D228" at 105.601,137.614 h0.89
  text "E5" at 78.804,137.36 h0.89 r180
  text "E2" at 36.005,137.106 h0.89 r180
  text "E3" at 50.356,137.106 h0.89 r180
  text "E12" at 107.125,137.106 h0.89 r180
  text "E6" at 93.028,136.979 h0.89 r180
  text "E4" at 64.961,136.852 h0.89 r180
  text "D123" at 95.314,133.042 h0.89 r270
  text "D108" at 53.023,132.915 h0.89 r270
  text "D103" at 38.672,132.788 h0.89 r270
  text "D118" at 81.344,132.788 h0.89 r270
  text "D113" at 67.247,132.661 h0.89 r270
  text "D153" at 109.792,132.661 h0.89 r270
  text "C6" at 86.043,131.486 h0.89 r270
  text "C12" at 100.394,130.613 h0.89 r270
  text "C4" at 57.976,130.502 h0.89 r270
  text "D111" at 39.485,128.47 h0.89
  text "D126" at 83.884,128.343 h0.89
  text "C5" at 72.073,128.327 h0.89 r270
  text "D156" at 98.743,128.089 h0.89
  text "C2" at 29.528,127.946 h0.89 r270
  text "D115" at 51.626,127.784 h0.89 r270
  text "D116" at 55.36,127.708 h0.89
  text "D121" at 68.644,127.708 h0.89
  text "C3" at 43.625,127.438 h0.89 r270
  text "D109" at 39.51,127.149 h0.89
  text "D124" at 83.884,127.073 h0.89
  text "D154" at 98.87,126.819 h0.89
  text "D119" at 68.644,126.565 h0.89
  text "D114" at 55.284,126.54 h0.89
  text "D107" at 51.626,126.057 h0.89 r270
  text "D155" at 96.584,125.93 h0.89
  text "D117" at 80.201,125.625 h0.89 r270
  text "D120" at 68.644,125.549 h0.89
  text "D125" at 83.884,125.422 h0.89
  text "D102" at 39.561,124.787 h0.89
  text "D110" at 42.965,124.66 h0.89
  text "D122" at 96.686,124.66 h0.89
  text "D112" at 68.644,124.406 h0.89
  text "D152" at 109.792,124.152 h0.89 r270
  text "D106" at 22.924,124.025 h0.89
  text "D104" at 22.924,122.882 h0.89
  text "D29" at 69.279,122.628 h0.89
  text "D26" at 26.988,122.501 h0.89
  text "D27" at 41.415,122.501 h0.89
  text "D30" at 83.249,122.501 h0.89
  text "D36" at 97.6,122.501 h0.89
  text "D28" at 55.715,122.247 h0.89
  text "D105" at 22.924,121.409 h0.89
  text "D227" at 34.405,120.088 h0.89
  text "D229" at 105.601,119.834 h0.89
  text "D225" at 63.412,119.707 h0.89
  text "D224" at 77.585,119.707 h0.89
  text "D223" at 91.606,119.707 h0.89
  text "E7" at 92.901,119.326 h0.89 r180
  text "E13" at 107.379,119.326 h0.89 r180
  text "E11" at 37.275,119.199 h0.89 r180
  text "E9" at 64.834,119.199 h0.89 r180
  text "E8" at 79.693,119.199 h0.89 r180
  text "D226" at 49.212,118.508 h0.89
  text "E10" at 52.388,117.04 h0.89 r270
  text "D143" at 52.967,116.279 h0.89 r270
  text "D138" at 67.12,114.881 h0.89 r270
  text "D158" at 109.919,114.754 h0.89 r270
  text "D128" at 95.06,114.5 h0.89 r270
  text "D133" at 81.344,114.373 h0.89 r270
  text "D148" at 39.053,114.246 h0.89 r270
  text "D136" at 71.641,113.611 h0.89
  text "R49" at 78.677,113.433 h0.89 r270
  text "D134" at 71.641,112.417 h0.89
  text "C8" at 71.819,112.325 h0.89 r270
  text "C7" at 86.17,112.198 h0.89 r270
  text "C10" at 43.752,111.436 h0.89 r270
  text "D135" at 71.641,111.198 h0.89
  text "C26" at 31.052,111.071 h0.89 r270
  text "R50" at 37.275,110.817 h0.89 r270
  text "D147" at 38.672,110.436 h0.89 r270
  text "D141" at 56.477,110.436 h0.89
  text "D131" at 84.011,110.309 h0.89
  text "D161" at 107.658,110.182 h0.89
  text "D151" at 25.997,110.055 h0.89
  text "D146" at 40.806,110.055 h0.89
  text "D139" at 56.223,109.166 h0.89
  text "C11" at 29.401,109.134 h0.89 r270
  text "D129" at 83.884,109.039 h0.89
  text "D159" at 107.658,108.912 h0.89
  text "D149" at 25.997,108.887 h0.89
  text "C13" at 100.648,108.896 h0.89 r270
  text "D144" at 40.729,108.785 h0.89
  text "D140" at 56.173,107.896 h0.89
  text "D130" at 83.884,107.896 h0.89
  text "D145" at 38.672,107.769 h0.89 r270
  text "D127" at 93.79,107.769 h0.89 r270
  text "D150" at 25.997,107.591 h0.89
  text "D142" at 51.626,107.591 h0.89 r270
  text "C25" at 75.502,107.083 h0.89 r270
  text "D160" at 101.156,106.753 h0.89
  text "D137" at 66.993,105.864 h0.89 r270
  text "D132" at 81.344,105.864 h0.89 r270
  text "D157" at 108.776,105.839 h0.89 r270
  text "C9" at 56.357,105.61 h0.89 r180
  text "D31" at 83.503,104.086 h0.89
  text "D33" at 54.674,103.959 h0.89
  text "D32" at 69.076,103.959 h0.89
  text "D35" at 26.353,103.832 h0.89
  text "D34" at 40.425,103.832 h0.89
  text "D37" at 97.735,103.832 h0.89
  text "D232" at 62.142,101.8 h0.89
  text "D240" at 105.728,101.8 h0.89
  text "D231" at 49.086,101.673 h0.89
  text "D234" at 91.733,101.673 h0.89
  text "D233" at 75.426,101.546 h0.89
  text "E18" at 93.409,101.546 h0.89 r180
  text "E14" at 36.259,101.292 h0.89 r180
  text "E15" at 50.356,101.165 h0.89 r180
  text "E16" at 64.707,101.165 h0.89 r180
  text "E17" at 78.931,101.165 h0.89 r180
  text "E24" at 107.76,101.165 h0.89 r180
  text "D163" at 38.926,100.657 h0.89 r270
  text "D230" at 31.865,100.53 h0.89
  text "D213" at 110.935,98.244 h0.89 r270
  text "D178" at 81.598,96.619 h0.89 r270
  text "D183" at 95.314,96.466 h0.89 r270
  text "D168" at 52.896,96.339 h0.89 r270
  text "D173" at 66.993,96.339 h0.89 r270
  text "C18" at 86.424,94.926 h0.89 r270
  text "C24" at 100.521,94.498 h0.89 r270
  text "C17" at 72.2,94.418 h0.89 r270
  text "C16" at 58.103,94.021 h0.89 r270
  text "C15" at 43.879,93.91 h0.89 r270
  text "C14" at 29.401,93.672 h0.89 r270
  text "D176" at 55.69,92.021 h0.89
  text "D181" at 69.076,92.021 h0.89
  text "D166" at 27.115,91.894 h0.89
  text "D171" at 41.263,91.894 h0.89
  text "D216" at 98.616,91.894 h0.89
  text "D186" at 84.9,91.64 h0.89
  text "D174" at 55.69,90.878 h0.89
  text "D165" at 24.6,90.751 h0.89
  text "D179" at 69.076,90.751 h0.89
  text "D214" at 98.616,90.751 h0.89
  text "D164" at 27.14,90.675 h0.89
  text "D169" at 41.288,90.548 h0.89
  text "D184" at 84.9,90.497 h0.89
  text "D170" at 37.656,90.472 h0.89 r270
  text "D175" at 53.531,89.989 h0.89
  text "D212" at 111.062,89.862 h0.89 r270
  text "D215" at 98.616,89.659 h0.89
  text "D180" at 68.771,89.608 h0.89
  text "D185" at 84.646,89.354 h0.89
  text "D167" at 53.531,88.719 h0.89
  text "D177" at 81.09,88.084 h0.89 r270
  text "D182" at 95.187,88.084 h0.89 r270
  text "D172" at 66.993,87.957 h0.89 r270
  text "D162" at 37.377,87.322 h0.89
  text "D40" at 56.579,87.068 h0.89
  text "D41" at 69.279,86.052 h0.89
  text "D42" at 83.579,86.052 h0.89
  text "D38" at 26.505,85.925 h0.89
  text "D48" at 97.473,85.798 h0.89
  text "D39" at 41.72,85.671 h0.89
  text "D239" at 34.913,84.02 h0.89
  text "D237" at 63.412,84.02 h0.89
  text "D236" at 77.966,84.02 h0.89
  text "D235" at 91.733,84.02 h0.89
  text "D217" at 105.728,84.02 h0.89
  text "D238" at 48.959,83.893 h0.89
  text "E23" at 36.386,83.258 h0.89 r180
  text "E22" at 50.61,83.258 h0.89 r180
  text "E20" at 78.931,83.131 h0.89 r180
  text "E19" at 93.028,83.131 h0.89 r180
  text "E21" at 64.834,83.004 h0.89 r180
  text "E1" at 106.998,83.004 h0.89 r180
  text "D208" at 38.926,78.432 h0.89 r270
  text "D188" at 95.187,78.432 h0.89 r270
  text "D98" at 109.792,78.432 h0.89 r270
  text "D198" at 67.12,78.407 h0.89 r270
  text "D203" at 53.15,78.204 h0.89 r270
  text "D193" at 81.471,78.178 h0.89 r270
  text "C21" at 57.722,74.908 h0.89 r270
  text "C22" at 43.752,74.797 h0.89 r270
  text "C23" at 29.274,74.416 h0.89 r270
  text "C20" at 72.708,74.162 h0.89 r270
  text "D211" at 26.759,73.987 h0.89
  text "D201" at 55.233,73.987 h0.89
  text "D196" at 69.787,73.987 h0.89
  text "D191" at 84.773,73.987 h0.89
  text "D101" at 98.489,73.987 h0.89
  text "C1" at 100.648,73.955 h0.89 r270
  text "D206" at 40.729,73.86 h0.89
  text "D209" at 26.759,72.717 h0.89
  text "D199" at 55.233,72.717 h0.89
  text "D194" at 69.787,72.717 h0.89
  text "D189" at 84.773,72.717 h0.89
  text "D99" at 98.489,72.717 h0.89
  text "D204" at 40.679,72.59 h0.89
  text "D210" at 22.975,72.082 h0.89
  text "D192" at 80.15,72.082 h0.89
  text "D205" at 39.434,71.955 h0.89
  text "D197" at 65.85,71.955 h0.89
  text "D187" at 94.679,71.955 h0.89
  text "D97" at 108.776,71.828 h0.89
  text "D200" at 53.023,71.701 h0.89 r270
  text "D195" at 69.863,71.676 h0.89
  text "D190" at 84.748,71.676 h0.89
  text "D100" at 98.489,71.574 h0.89
  text "D46" at 39.434,71.193 h0.89
  text "D47" at 25.083,71.066 h0.89
  text "D45" at 53.277,71.066 h0.89
  text "D43" at 81.471,70.939 h0.89
  text "D207" at 39.688,70.558 h0.89
  text "D25" at 95.568,70.558 h0.89
  text "D44" at 69.152,70.05 h0.89
  text "D92" at 40.577,69.669 h0.89 r270
  text "D202" at 51.651,69.669 h0.89
  text "D90" at 53.404,69.669 h0.89 r270
  text "D80" at 61.532,69.669 h0.89 r270
  text "D82" at 74.994,69.669 h0.89 r270
  text "D84" at 88.964,69.669 h0.89 r270
  text "C19" at 83.588,69.63 h0.89 r270
  text "D88" at 82.614,69.542 h0.89 r270
  text "D76" at 30.417,69.415 h0.89 r270
  text "D86" at 96.711,69.415 h0.89 r270
  text "D50" at 112.205,69.288 h0.89 r270
  text "D78" at 46.292,69.161 h0.89 r270
  text "D94" at 24.321,69.034 h0.89 r270
  text "D96" at 100.394,69.034 h0.89 r270
  text "Q21" at 55.436,63.954 h0.89
  text "Q23" at 26.912,63.573 h0.89
  text "Q15" at 48.324,63.573 h0.89
  text "Q18" at 91.123,63.573 h0.89
  text "Q1" at 114.491,63.573 h0.89
  text "Q19" at 99.124,63.446 h0.89
  text "Q14" at 33.592,63.319 h0.89
  text "Q22" at 42.736,63.319 h0.89
  text "Q17" at 77.636,63.319 h0.89
  text "Q20" at 84.773,63.319 h0.89
  text "Q24" at 96.457,63.065 h0.89
  text "Q16" at 63.945,62.938 h0.89
  text "R16" at 64.453,61.16 h0.89
  text "R21" at 56.071,61.033 h0.89
  text "R20" at 85.027,61.033 h0.89
  text "R18" at 91.809,61.033 h0.89
  text "R19" at 98.743,61.033 h0.89
  text "R23" at 27.42,60.906 h0.89
  text "R14" at 34.354,60.906 h0.89
  text "R22" at 41.644,60.906 h0.89
  text "R17" at 78.093,60.906 h0.89
  text "R24" at 97.092,60.906 h0.89
  text "R1" at 115.253,60.906 h0.89
  text "R15" at 48.705,60.779 h0.89
  text "R38" at 34.227,59.001 h0.89
  text "R40" at 64.453,59.001 h0.89
  text "R39" at 48.578,58.874 h0.89
  text "R45" at 55.944,58.874 h0.89
  text "R44" at 84.9,58.874 h0.89
  text "R48" at 96.965,58.874 h0.89
  text "R43" at 98.489,58.874 h0.89
  text "R25" at 114.745,58.874 h0.89
  text "R47" at 27.42,58.747 h0.89
  text "R41" at 77.839,58.747 h0.89
  text "R42" at 91.682,58.747 h0.89
  text "R46" at 41.644,58.62 h0.89
Mechanical 15:
  text "CON11" at 20.575,162.76 h1.78 r180
  text "CON5" at 75.851,162.76 h1.78 r180
  text "CON8" at 86.9,162.76 h1.78 r180
  text "CON9" at 64.263,162.735 h1.78 r180
  text "CON2" at 9.557,162.633 h1.78 r180
  text "CON3" at 31.909,162.633 h1.78 r180
  text "CON10" at 42.831,162.633 h1.78 r180
  text "CON4" at 53.404,162.633 h1.78 r180
  text "CON6" at 97.41,162.633 h1.78 r180
  text "CON12" at 120.555,162.506 h1.78 r180
  text "CON13" at 131.731,162.506 h1.78 r180
  text "CON7" at 109.125,162.379 h1.78 r180
  text "A5" at 77.153,149.806 h1.78 r180
  text "A11" at 33.433,149.679 h1.78 r180
  text "A8" at 84.138,149.679 h1.78 r180
  text "A6" at 91.853,149.679 h1.78 r180
  text "A7" at 99.251,149.679 h1.78 r180
  text "A13" at 114.237,149.679 h1.78 r180
  text "A9" at 63.278,149.58 h1.78 r180
  text "A2" at 25.591,149.552 h1.78 r180
  text "A3" at 40.704,149.552 h1.78 r180
  text "A10" at 48.959,149.552 h1.78 r180
  text "A4" at 55.976,149.552 h1.78 r180
  text "A12" at 106.871,149.552 h1.78 r180
  text "S2" at 135.636,122.194 h1.78 r180
  text "S1" at 135.351,97.625 h1.78 r180
  text "A1" at 112.554,60.088 h1.78 r180
  text "A23" at 25.718,59.89 h1.78 r180
  text "A14" at 32.735,59.89 h1.78 r180
  text "A18" at 90.615,59.89 h1.78 r180
  text "A24" at 105.125,59.782 h1.78 r180
  text "A22" at 40.958,59.763 h1.78 r180
  text "A16" at 63.151,59.763 h1.78 r180
  text "A17" at 76.391,59.763 h1.78 r180
  text "A15" at 47.435,59.636 h1.78 r180
  text "A21" at 54.896,59.636 h1.78 r180
  text "A20" at 83.63,59.636 h1.78 r180
  text "A19" at 97.822,59.636 h1.78 r180
  text "CON21" at 53.883,47.082 h1.78 r180
  text "CON15" at 42.704,47.063 h1.78 r180
  text "CON20" at 86.9,47.063 h1.78 r180
  text "CON18" at 98.076,47.063 h1.78 r180
  text "CON17" at 76.359,46.809 h1.78 r180
  text "CON24" at 121.095,46.776 h1.78 r180
  text "CON14" at 21.527,46.682 h1.78 r180
  text "CON16" at 65.406,46.682 h1.78 r180
  text "CON19" at 108.967,46.682 h1.78 r180
  text "CON23" at 10.446,46.555 h1.78 r180
  text "CON22" at 32.29,46.555 h1.78 r180
  text "CON1" at 130.811,46.555 h1.78 r180